# EAGLE board Minimotor (EAGLE 9.6.2)
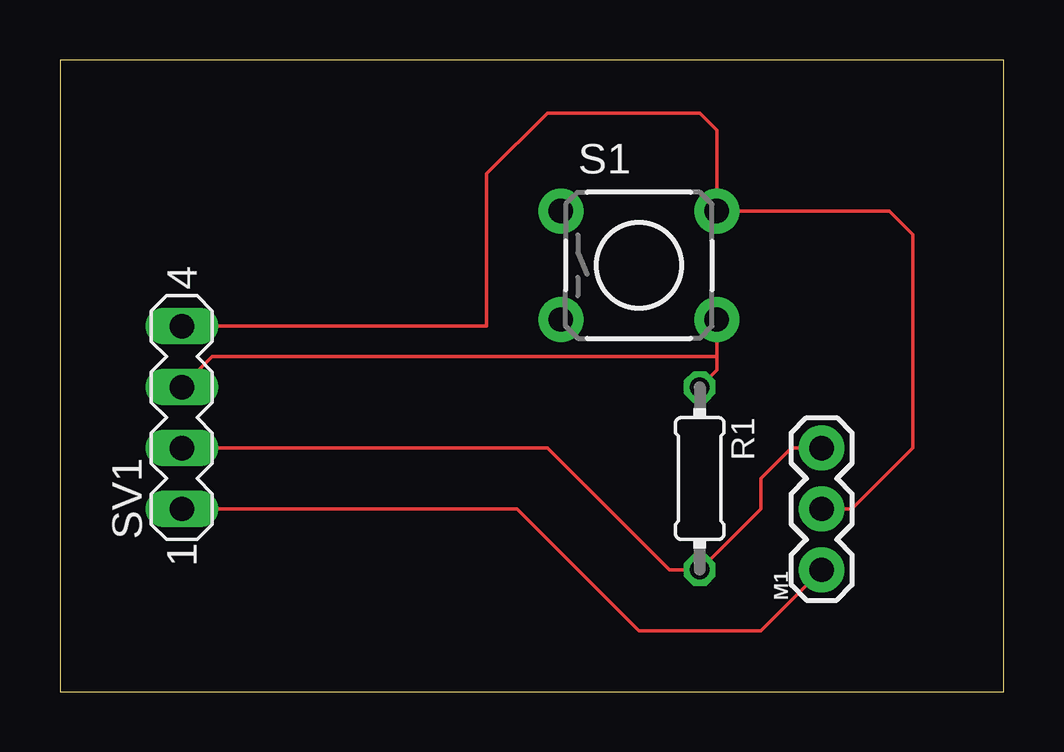
[diagram p0: board, top side]

Size 39.35 x 26.34 mm. Coordinates in mm from the lower left corner, seen from the top.
Outline: 0,0 39.35,0 39.35,26.34 0,26.34 0,0
Copper layers (1*16): Top 0.035mm / dielectric 1.5mm / Bottom 0.035mm
Design rules "default": minimum track width 6mil, minimum drill 0.35mm, track to track 6mil, track to pad 6mil, pad to pad 6mil, via to via 6mil, smd to smd 6mil, copper to edge 40mil, drill to drill 6mil, minimum pad ring 10mil, minimum via ring 8mil, stop-mask expansion 4mil, vias tented up to drill 0mil, thermal gap 10mil

## Footprints (pad centres in the part's own frame; a part is rotated, then mirrored left to right if it is on the bottom)
1X03 = drill 1.016 pad 1.88: 1 0,0; 2 2.54,0; 3 5.08,0
0204/7 = drill 0.813 octagon: 1 -3.81,0; 2 3.81,0
TACTILE-PTH = drill 1.016 pad 1.88: 1 -3.251,2.261; 2 3.251,2.261; 3 -3.251,-2.261; 4 3.251,-2.261
MA04-1 = drill 1.016 long: 1 -3.81,0; 2 -1.27,0; 3 1.27,0; 4 3.81,0

## Placement (x,y rotation side)
M1  SERVO  [1X03]  31.75,5.08 90 top
R1  [0204/7]  26.67,8.89 270 top
S1  [TACTILE-PTH]  24.13,17.78 0 top
SV1  [MA04-1]  5.08,11.43 90 top

## Library data of the parts
M1 = SparkFun-Electromechanical
R1 = rcl; SPICEPREFIX: R
S1 = SparkFun-Retired
SV1 = con-lstb; OC_FARNELL: unknown; OC_NEWARK: unknown

## Nets
N$1: R1.1 S1.4 SV1.3
N$2: M1.3 R1.2 SV1.2
N$3: M1.1 SV1.1
N$4: M1.2 S1.2 SV1.4

## Tracks (layer width: path | path; a pad name or v marks a point on that pad's centre or on a via)
N$1
  Top 0.152: S1.4 27.38,13.97 | 27.38,13.97 27.38,13.41 R1.1 | SV1.3 6.35,13.97 27.38,13.97
N$2
  Top 0.152: M1.3 30.48,10.16 29.21,8.89 29.21,7.62 R1.2 25.4,5.08 20.32,10.16 SV1.2
N$3
  Top 0.152: SV1.1 19.05,7.62 24.13,2.54 29.21,2.54 M1.1
N$4
  Top 0.152: SV1.4 17.78,15.24 17.78,21.59 20.32,24.13 26.67,24.13 27.38,23.42 S1.2 34.57,20.04 35.56,19.05 35.56,10.16 33.02,7.62 M1.2